# EAGLE board electronicDie (EAGLE 9.6.2)
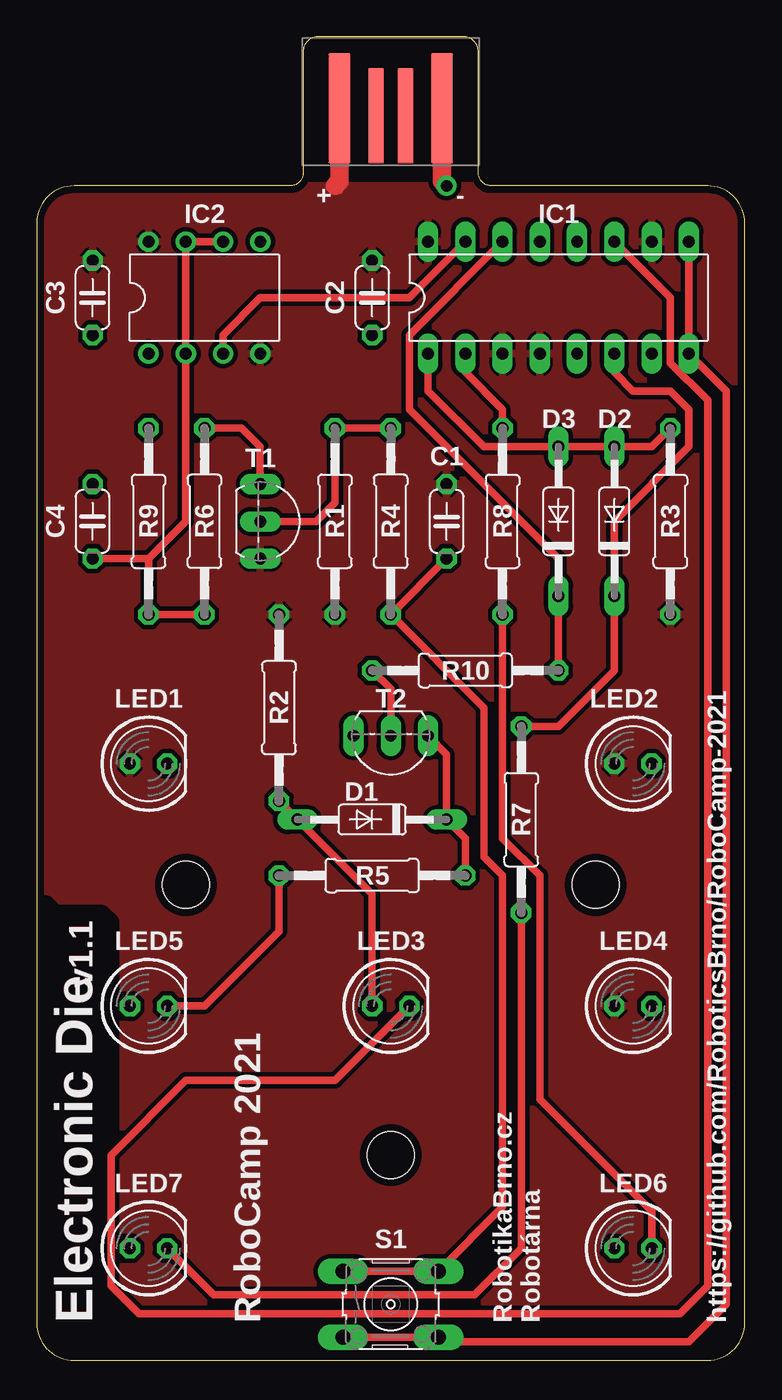
[diagram p0: board, top side]
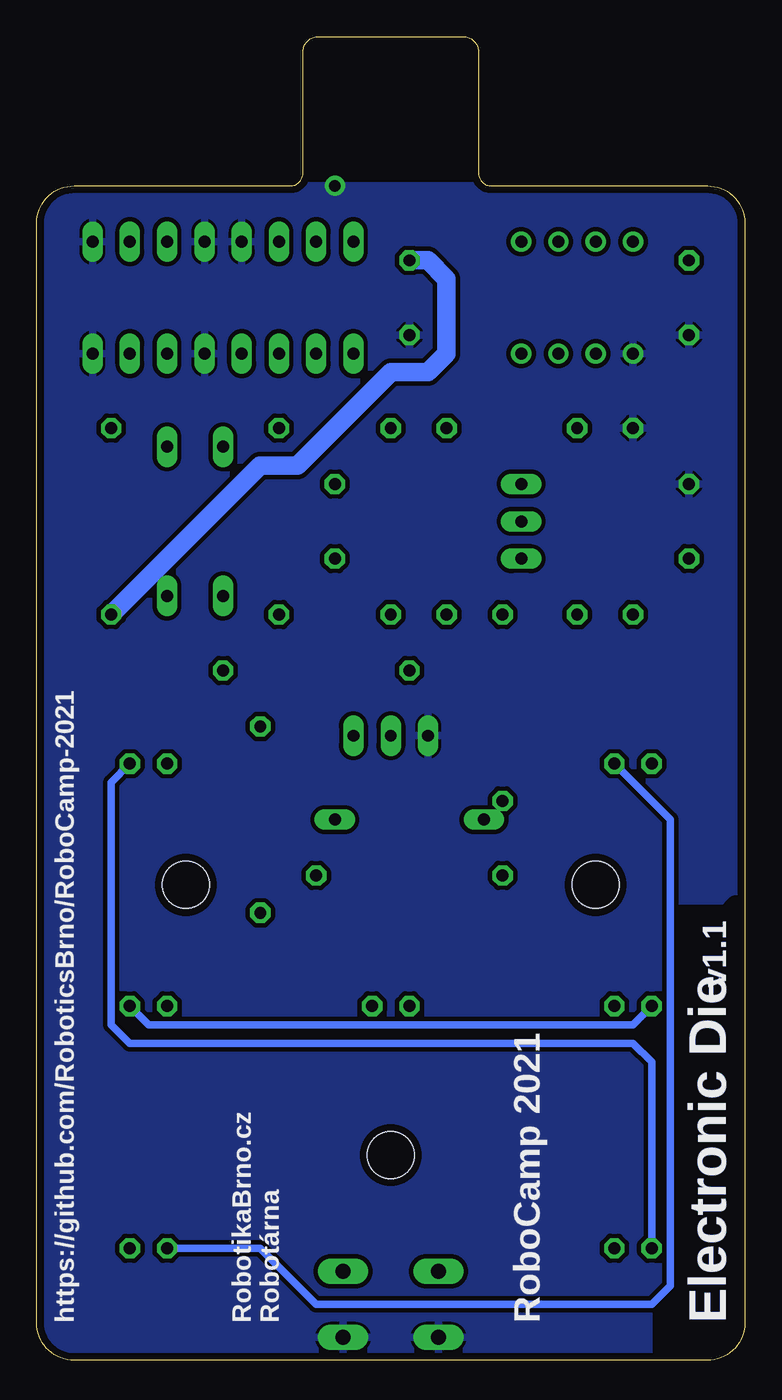
[diagram p1: board, bottom side, seen from below]

Size 48.26 x 90.17 mm. Coordinates in mm from the lower left corner, seen from the top.
Outline: 0,2.54 arc90 2.54,0 45.72,0 arc90 48.26,2.54 48.26,77.47 arc90 45.72,80.01 30.99,80.01 arc-90 30.1,80.9 30.1,89.15 arc90 29.08,90.17 19.18,90.17 arc90 18.16,89.15 18.16,80.9 arc-90 17.27,80.01 2.54,80.01 arc90 0,77.47 0,2.54
Copper layers (1*16): Top 0.035mm / dielectric 2mm / Bottom 0.035mm
Design rules "roboticsbrno": minimum track width 0.15mm, minimum drill 0.3mm, track to track 0.15mm, track to pad 0.15mm, pad to pad 0.15mm, via to via 0.15mm, smd to smd 0.15mm, copper to edge 0.5mm, drill to drill 0.5mm, minimum pad ring 0.16mm, minimum via ring 0.16mm, stop-mask expansion 0.1mm, vias tented up to drill 0.4mm, thermal gap 0.2mm
Holes 3.2 mm at 10.16,32.38 38.1,32.38 24.13,13.97
tRestrict: 4 lines
bRestrict: 3 lines

## Footprints (pad centres in the part's own frame; a part is rotated, then mirrored left to right if it is on the bottom)
C050-024X044 = drill 0.813 octagon: 1 -2.54,0; 2 2.54,0
DO35-10 = drill 0.813 long: A 5.08,0; C -5.08,0
DIL16 = drill 0.813 long: 1 -8.89,-3.81; 2 -6.35,-3.81; 3 -3.81,-3.81; 4 -1.27,-3.81; 5 1.27,-3.81; 6 3.81,-3.81; 7 6.35,-3.81; 8 8.89,-3.81; 9 8.89,3.81; 10 6.35,3.81; 11 3.81,3.81; 12 1.27,3.81; 13 -1.27,3.81; 14 -3.81,3.81; 15 -6.35,3.81; 16 -8.89,3.81
DIL08 = drill 0.813 pad 1.27: 1 -3.81,-3.81; 2 -1.27,-3.81; 3 1.27,-3.81; 4 3.81,-3.81; 5 3.81,3.81; 6 1.27,3.81; 7 -1.27,3.81; 8 -3.81,3.81
LED5MM = drill 0.813 octagon: A -1.27,0; K 1.27,0
0207/12 = drill 0.813 octagon: 1 -6.35,0; 2 6.35,0
B3F-10XX = drill 1.016 long: 1 -3.251,2.261; 2 3.251,2.261; 3 -3.251,-2.261; 4 3.251,-2.261
TO92-CBE = drill 0.813 long: B 0,0; C -2.54,0; E 2.54,0
USB-A-PCB = smd 7.5 x 1.5: 5V -0.2,-3.5; GND -0.2,3.5 | smd 6.5 x 1.067: USB_M 0.3,-1; USB_P 0.3,1

## Placement (x,y rotation side)
C1  100n  [C050-024X044]  27.94,57.15 270 top
C2  100n  [C050-024X044]  22.86,72.39 270 top
C3  100n  [C050-024X044]  3.81,72.39 270 top
C4  100n  [C050-024X044]  3.81,57.15 90 top
D1  1N4148  [DO35-10]  22.86,36.83 180 top
D2  1N4148  [DO35-10]  39.37,57.15 90 top
D3  1N4148  [DO35-10]  35.56,57.15 90 top
IC1  CD4029N  [DIL16]  35.56,72.39 0 top
IC2  NE555N  [DIL08]  11.43,72.39 0 top
LED1  red  [LED5MM]  7.62,40.64 0 top
LED2  red  [LED5MM]  40.64,40.64 0 top
LED3  red  [LED5MM]  24.13,24.13 0 top
LED4  red  [LED5MM]  40.64,24.13 0 top
LED5  red  [LED5MM]  7.62,24.13 0 top
LED6  red  [LED5MM]  40.64,7.62 0 top
LED7  red  [LED5MM]  7.62,7.62 0 top
R1  4M7  [0207/12]  20.32,57.15 270 top
R2  2k2  [0207/12]  16.51,44.45 90 top
R3  10k  [0207/12]  43.18,57.15 270 top
R4  4M7  [0207/12]  24.13,57.15 90 top
R5  1k  [0207/12]  22.86,33.02 180 top
R6  10k  [0207/12]  11.43,57.15 90 top
R7  1k  [0207/12]  33.02,36.83 270 top
R8  1k  [0207/12]  31.75,57.15 270 top
R9  4M7  [0207/12]  7.62,57.15 270 top
R10  10k  [0207/12]  29.21,46.99 180 top
S1  [B3F-10XX]  24.13,3.81 0 top
T1  BC557B  [TO92-CBE]  15.24,57.15 270 top
T2  BC547B  [TO92-CBE]  24.13,42.55 180 top
X1  USBPCB  [USB-A-PCB]  24.13,85.09 270 top

## Library data of the parts
C1-C4 R1-R10 = rcl_upravena
D1-D3 = diode
IC1 = 40xx
IC2 = 555
LED1-LED7 = led
S1 = switch-omron; MPN: B3F-1000; OC_FARNELL: 176432; OC_NEWARK: 36M3542
T1 T2 = transistor
X1 = USB

## Nets
+5V: C1.1 C2.1 C3.1 IC1.3 IC1.4 IC1.10 IC1.16 IC2.4 IC2.8 LED1.A LED2.A LED4.A R1.2 R2.2 R3.2 T1.E X1.5V
GND: C2.2 C3.2 C4.2 IC1.5 IC1.8 IC1.9 IC1.12 IC1.13 IC2.1 R9.1 S1.3 S1.4 T2.E X1.GND
N$1: C1.2 R4.1 S1.1 S1.2
N$2: R1.1 R4.2 T1.B
N$4: R6.2 T1.C
N$5: C4.1 IC2.2 IC2.6 IC2.7 R6.1 R9.2
N$6: IC2.5
N$7: IC1.15 IC2.3
N$8: LED7.K R7.2
N$9: D2.A D3.A IC1.1 R3.1
N$10: D2.C IC1.6 R7.1
N$11: D3.C IC1.14 R10.1
N$12: IC1.2 R8.1
N$13: LED4.K LED5.A
N$14: LED2.K LED7.A
N$15: IC1.7
N$16: LED1.K LED6.A
N$17: R10.2 T2.B
N$18: LED5.K R5.2
N$19: D1.A LED3.A R2.1
N$20: IC1.11 LED3.K
N$21: D1.C R5.1 T2.C
N$22: LED6.K R8.2
N$23: X1.USB_M
N$24: X1.USB_P

## Tracks (layer width: path | path; a pad name or v marks a point on that pad's centre or on a via)
+5V
  Top 0.508: 20.63,80.32 20.63,79.7
  Top 1.27: X1.5V 20.63,80.32 20.32,80.01
  Bottom 1.27: R3.2 33.02,60.96 30.48,60.96 24.13,67.31 21.59,67.31 20.32,68.58 20.32,73.66 21.59,74.93 C2.1
  pour Top (isolate 0.305): 0,0 0,80.01 48.26,80.01 48.26,0
GND  (via drill 0.8)
  Top 0.508: IC1.9 IC1.8 46.99,66.04 46.99,3.81 44.45,1.27 27.66,1.27 S1.4 S1.3
  Top 1.27: X1.GND 27.63,80.32 v27.94,80.01
  pour Bottom (isolate 0.305): 0,0 0,80.01 48.26,80.01 48.26,0
N$1
  Top 0.508: S1.1 S1.2 31.75,10.44 31.75,33.02 30.48,34.29 30.48,44.45 R4.1 C1.2
N$2
  Top 0.508: T1.B 19.05,57.15 20.32,58.42 R1.1 R4.2
N$4
  Top 0.508: T1.C 15.24,62.23 13.97,63.5 R6.2
N$5
  Top 0.508: IC2.6 IC2.7 IC2.2 10.16,57.15 7.62,54.61 | 7.62,54.61 C4.1 | 7.62,54.61 R9.2 R6.1
N$7
  Top 0.508: IC2.3 12.7,69.85 15.24,72.39 25.4,72.39 IC1.15
N$8
  Top 0.508: LED7.K 12.06,4.45 29.84,4.45 33.02,7.62 R7.2
N$9
  Top 0.508: IC1.1 26.67,66.04 30.48,62.23 D3.A D2.A 41.91,62.23 R3.1
N$10
  Top 0.508: IC1.6 39.37,67.31 40.64,66.04 43.18,66.04 44.45,64.77 44.45,62.23 39.37,57.15 D2.C 39.37,46.99 35.56,43.18 R7.1
N$11
  Top 0.508: IC1.14 25.4,69.85 25.4,64.77 35.56,54.61 D3.C R10.1
N$12
  Top 0.508: R8.1 31.75,64.77 29.21,67.31 IC1.2
N$13
  Bottom 0.508: LED5.A 7.62,22.86 40.64,22.86 LED4.K
N$14
  Bottom 0.508: LED2.K 43.18,39.37 43.18,22.86 41.91,21.59 7.62,21.59 6.35,20.32 LED7.A
N$16
  Bottom 0.508: LED1.K 5.08,36.83 5.08,5.08 6.35,3.81 29.21,3.81 33.02,7.62 LED6.A
N$17
  Top 0.508: T2.B 24.13,45.72 R10.2
N$18
  Top 0.508: LED5.K 11.43,24.13 16.51,29.21 R5.2
N$19
  Top 0.508: R2.1 D1.A 22.86,31.75 LED3.A
N$20
  Top 0.508: IC1.11 43.18,72.39 43.18,67.94 45.72,65.41 45.72,5.08 43.81,3.17 29.84,3.17 6.99,3.17 5.08,5.08 5.08,13.97 10.16,19.05 20.32,19.05 LED3.K
N$21
  Top 0.508: R5.1 29.21,35.56 D1.C 27.94,41.27 T2.C
N$22
  Top 0.508: LED6.K 41.91,10.16 34.29,17.78 34.29,33.02 31.75,35.56 R8.2

## Text on the board
Top: v1.1 | Electronic Die
Bottom: v1.1 | Electronic Die
tSilk: + | - | v1.1 | Electronic Die | RoboCamp 2021 | RobotikaBrno.cz / Robotárna | https://github.com/RoboticsBrno/RoboCamp-2021
bSilk: v1.1 | Electronic Die | RoboCamp 2021 | RobotikaBrno.cz / Robotárna | https://github.com/RoboticsBrno/RoboCamp-2021